# Altium PCB DieselHeaterV2.PcbDoc
Units mil, origin at the board's own origin, x right, y up, seen from the top; angles counter-clockwise.
Board outline 2940 x 1920 mil, 2 copper layers (Top Layer, Bottom Layer), stack 61.855 mil thick; 49 components, 40 nets, 228 pads, 26 vias.
Unrouted connection lines stored in the file: 54.
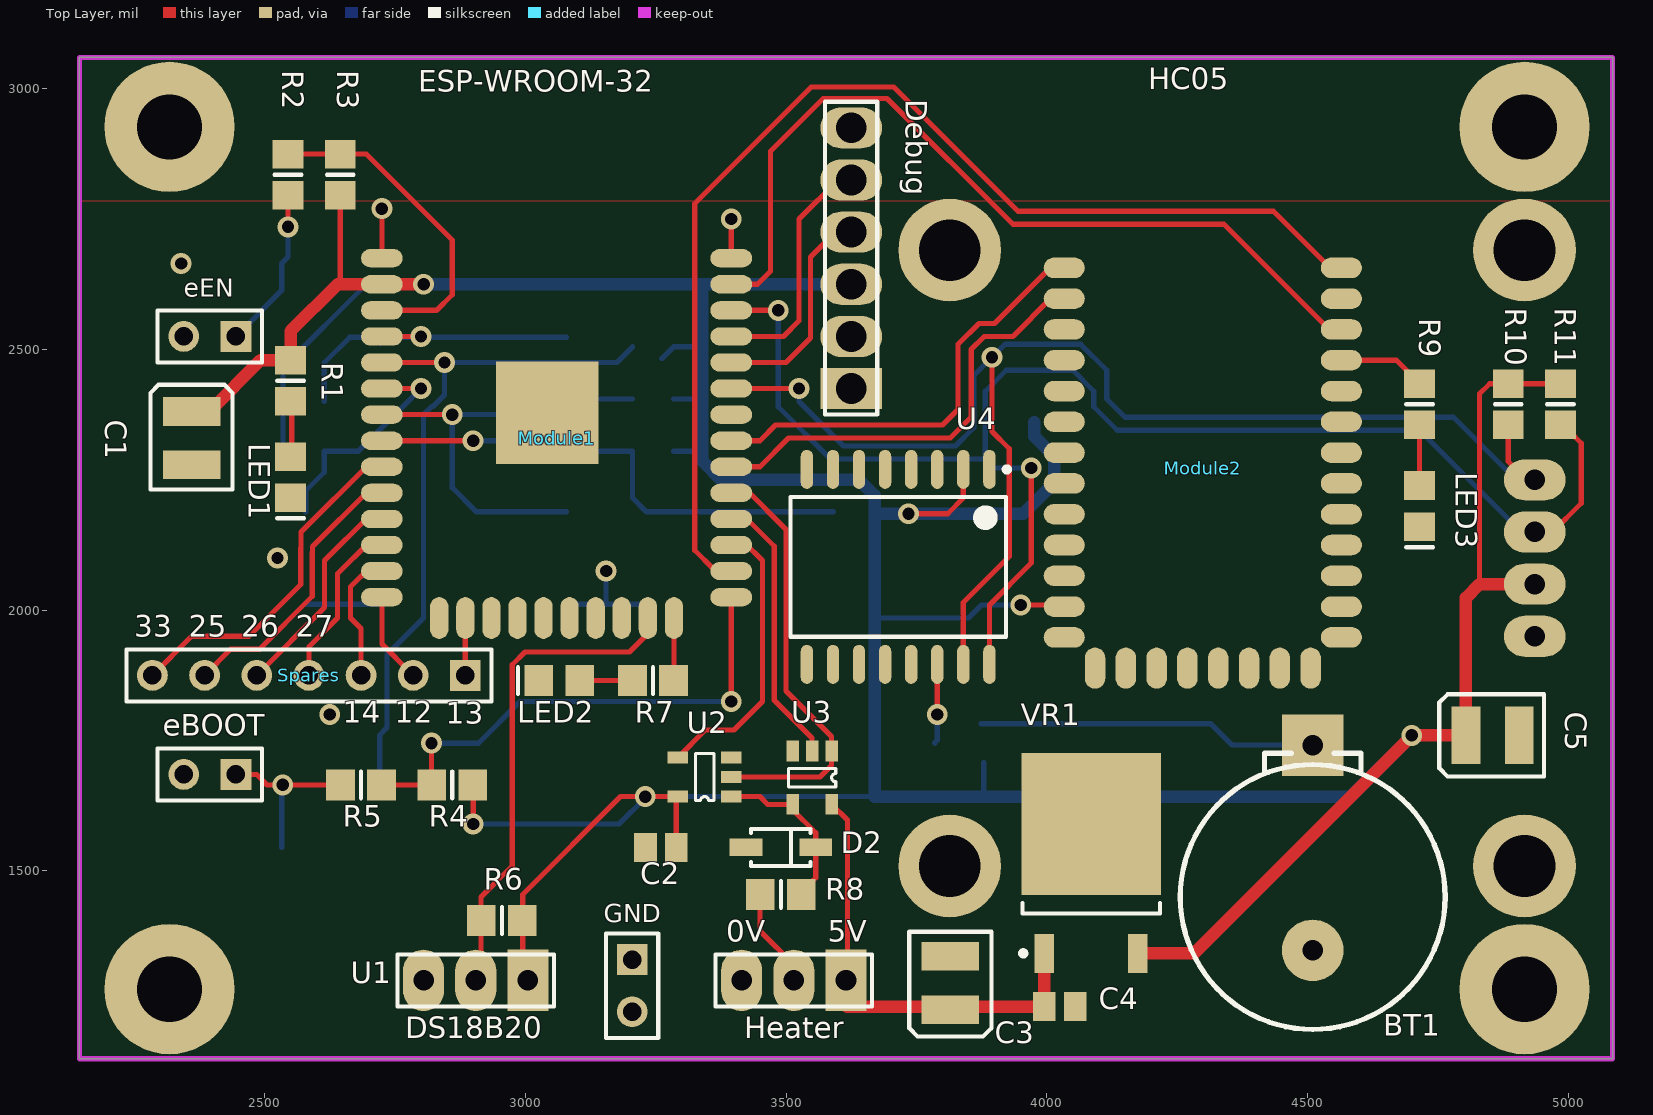
[diagram p0: Top Layer view]
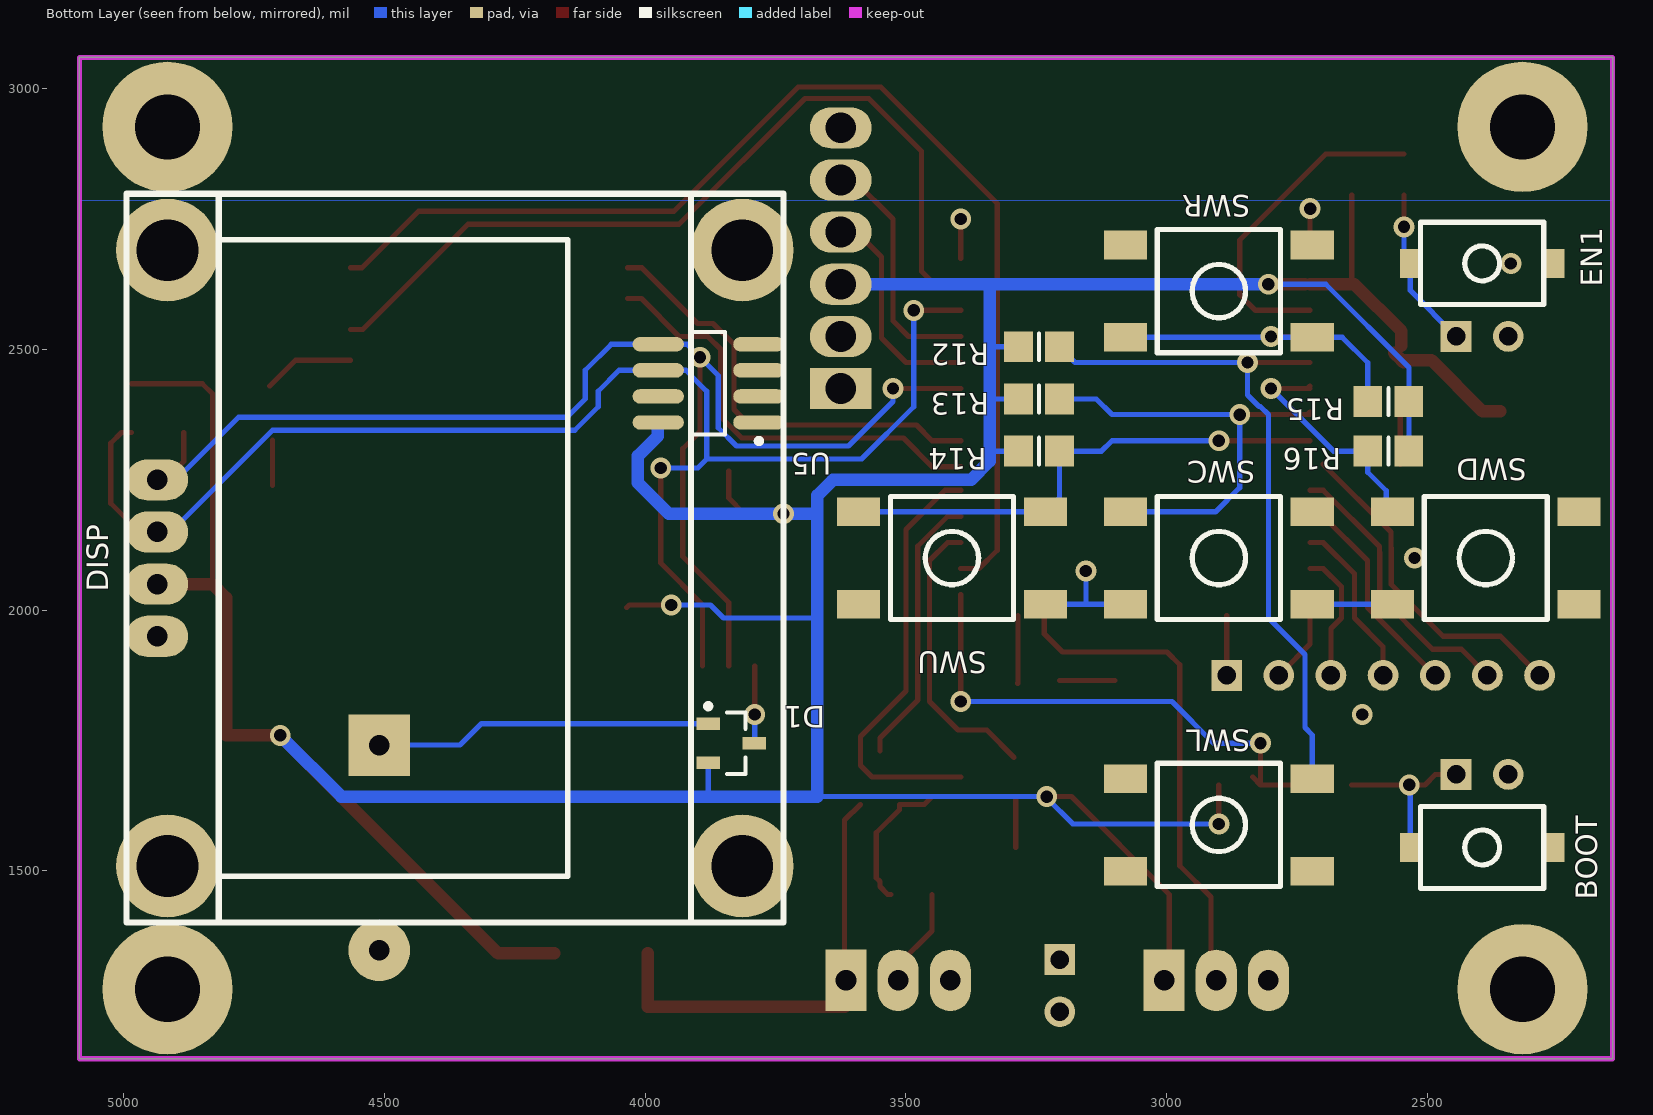
[diagram p1: Bottom Layer view, seen from below]
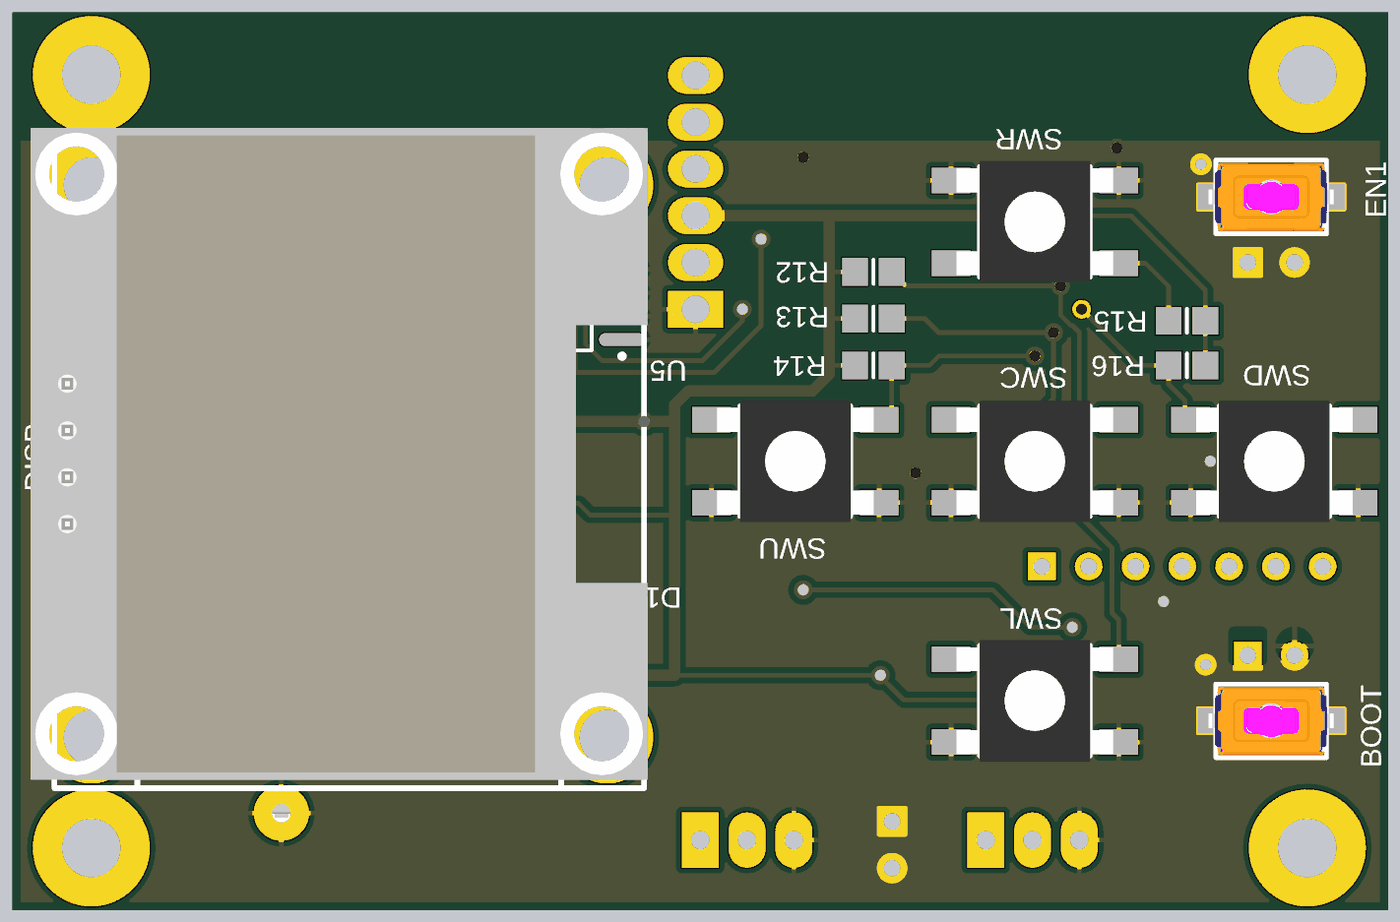
[diagram p2: 3D render of the assembled board from below, using the file's embedded part models]

## Layer stack, top to bottom
Top Solder: solder mask 0.4, Solder Resist, Dk 3.5
Top Layer: signal copper 1.4
Dielectric 1: dielectric 59.0551, FR-4, Dk 4.8
Bottom Layer: signal copper 1.4
Bottom Solder: solder mask 0.4, Solder Resist, Dk 3.5

## Board outline
2145,1140 2145,3060 5085,3060 5085,1140

## Design rules (kind name [scope] priority, off if disabled: settings)
Clearance [All] p1: gap=12 ignorepadtopadclearanceinfootprint=FALSE
HoleSize [All] p1: absolutevalues=TRUE maxlimit=125 minlimit=0.98 maxpercent=80.000 minpercent=20.000
MinimumSolderMaskSliver [All] p1: minsoldermaskwidth=8
PolygonConnect PolygonConnect_1 [isVia] p1: connectstyle=Direct reliefconductorwidth=10 reliefentries=4 polygonreliefangle="90 Angle" airgapwidth=10
PolygonConnect [All] p2: connectstyle=Relief reliefconductorwidth=10 reliefentries=4 polygonreliefangle="90 Angle" airgapwidth=12
RoutingVias [All] p1: holewidth=28 width=50 viastyle="Through Hole" minholewidth=28 minwidth=50 maxholewidth=28 maxwidth=50
SolderMaskExpansion [All] p1: expansion=3.15
Width [All] p1: maxlimit=50 minlimit=10 preferedwidth=10
28 further rules are at their usual default settings.

## Classes and differential pairs
component class U_UserInterface: BT1 D1 DISP R10 R11 SWC SWD SWL SWR SWU U4 U5
component class DieselHeater: BOOT C1 C2 C3 C4 C5 D2 Debug eBOOT eEN EN1 GND Heater LED1 LED2 LED3 Module1 Module2 R1 R2 R3 R4 R5 R6 R7 R8 R9 R12 R13 R14 R15 R16 Spares U1 U2 U3 VR1

## Components (designator, comment, footprint, x,y, rotation, side; value= is the part's Value field where it differs from the comment)
BOOT "SW-PB" TACTILE_SW_SIL 2395,1545 r0 bottom
BT1 "CR1220" C1220-1HF 4510,1450 r90 top
C1 "470uF" CASEB 2360,2330 r90 top
C2 "100n" C0805 3260,1545 r180 top value=100pF
C3 "470uF" CASEB 3815,1285 r270 top
C4 "100n" C0805 4025,1240 r0 top value=100nF
C5 "470uF" CASEB 4855,1760 r180 top
D1 "BAT54C" SOT-23_N 3835,1745 r180 bottom
D2 "5V6" SOD-123 3490,1545 r0 top
Debug "Header 6" HDR1X6 3625,2425 r90 top
DISP "OLED_128x64" "OLED 1.3" 4365,2100 r90 bottom locked
eBOOT "Header 2" HDR1X2 2445,1685 r180 top
eEN "Header 2" HDR1X2 2445,2525 r180 top
EN1 "SW-PB" TACTILE_SW_SIL 2395,2665 r0 bottom
GND "Header 2" HDR1X2 3205,1330 r270 top
Heater "Header 3" HDR1X3 3615,1290 r180 top
LED1 "GRN" 0805_LED 2550,2255 r270 top
LED2 "BLUE" 0805_LED 3065,1865 r180 top
LED3 "RED" 0805_LED 4715,2199.53 r270 top
Module1 "ESP-WROOM-32" ESP-WROOM-32 3060,1985 r0 top
Module2 "HC05" HC05 4033.5,2656.5 r0 top locked
R1 "470" 6-0805_M 2550,2440 r90 top
R2 "470" 6-0805_M 2545,2835 r90 top
R3 "12k" 6-0805_M 2645,2835 r270 top
R4 "470" 6-0805_M 2685,1665 r0 top
R5 "12k" 6-0805_M 2860,1665 r0 top
R6 "4k7" 6-0805_M 2955,1405 r0 top
R7 "470" 6-0805_M 3245,1865 r0 top
R8 "680" 6-0805_M 3490,1455 r180 top
R9 "470" 6-0805_M 4715,2395 r90 top
R10 "4k7" 6-0805_M 4885,2395 r90 top
R11 "4k7" 6-0805_M 4985,2395 r90 top
R12 "4k7" 6-0805_M 3245,2505 r0 bottom
R13 "4k7" 6-0805_M 3245,2405 r0 bottom
R14 "4k7" 6-0805_M 3245,2305 r0 bottom
R15 "4k7" 6-0805_M 2575,2400 r180 bottom
R16 "4k7" 6-0805_M 2575,2305 r180 bottom
Spares "" HDR1X7 2885,1875 r180 top
SWC "SMD_TACTILE_SW" SMD_TACTILE_SW 2900,2100 r90 bottom locked
SWD "SMD_TACTILE_SW" SMD_TACTILE_SW 2388.19,2100 r90 bottom locked
SWL "SMD_TACTILE_SW" SMD_TACTILE_SW 2900,1588.19 r90 bottom locked
SWR "SMD_TACTILE_SW" SMD_TACTILE_SW 2900,2611.81 r270 bottom locked
SWU "SMD_TACTILE_SW" SMD_TACTILE_SW 3411.81,2100 r90 bottom locked
U1 "DS18B20" HDR1X3 3005,1290 r180 top
U2 "74LVC1G32DBV" SOT23-5 3395,1680 r90 top
U3 "74LVC1G126DBV" SOT23-5 3550,1730 r180 top
U4 "DS3231" SOIC127P1030X265-16N 3715,2082.99 r270 top
U5 "I2CEEPROM" SO8_M 3878.54,2435 r0 bottom
VR1 "LM1117-3.3" SOT-252-3 4085,1515.2 r90 top

## Footprints (in the part's own frame and the unit in brackets; to place one, negate y for a bottom-side part, rotate by r counter-clockwise, add the part's x,y. Pads: shape width x height; smd on the part's side, far side on the other; paste and mask are expansions set on the pad)
6-0805_M [mm] "Chip Resistor, Body 2.0x1.2mm, IPC Low Density"
  rect 1.4x1.5 smd: 1(-1,0) 2(1,0)
  silkscreen extent 0,-0.65 0,0.65, body extent -1.07,-0.7 1.07,0.7, height 0.7
0805_LED [mm]
  rect 1.4x1.5 smd: 1(-1,0) 2(1,0)
  silkscreen extent 2,-0.65 2,0.65, body extent -1.03,-0.46 1.03,0.45, height 0.85
C0805 [mm] "Chip Capacitor, Body 2.0x1.3mm, IPC High Density"
  rect 1.1x1.4 smd: 1(-0.75,0) 2(0.75,0)
  body extent -1.1,-0.72 1.1,0.72, height 1.4
C1220-1HF [mm]
  rect 3x3 hole 1: 1(7.4,0)
  round 3 hole 1: 2(-2.6,0)
  silkscreen extent -6.45,-6.45 7,6.45, body extent -6.25,-6.25 7.45,6.25, height 4.2
CASEB [mm]
  rect 1.4x2.8 smd: 1(1.3,0) 2(-1.3,0)
  silkscreen extent -2.5,-2 2.6,2, body extent -1.75,-1.4 1.75,1.4, height 1.91
ESP-WROOM-32 [mil]
  oval 80x35 smd: 1(-335,690) 2(-335,640) 3(-335,590) 4(-335,540) 5(-335,490) 6(-335,440) 7(-335,390) 8(-335,340) 9(-335,290) 10(-335,240) 11(-335,190) 12(-335,140) 13(-335,90) 14(-335,40) 25(335,40) 26(335,90) 27(335,140) 28(335,190) 29(335,240) 30(335,290) 31(335,340) 32(335,390) 33(335,440) 34(335,490) 35(335,540) 36(335,590) 37(335,640) 38(335,690)
  oval 35x80 smd: 15(-225,0) 16(-175,0) 17(-125,0) 18(-75,0) 19(-25,0) 20(25,0) 21(75,0) 22(125,0) 23(175,0) 24(225,0)
  rect 196.85x196.85 smd: 39(-17.72,393.7)
  body extent -356,-20 356,986, height 118
HC05 [mm]
  oval 2x1 smd: 1(0,0) 2(0,-1.5) 3(0,-3) 4(0,-4.5) 5(0,-6) 6(0,-7.5) 7(0,-9) 8(0,-10.5) 9(0,-12) 10(0,-13.5) 11(0,-15) 12(0,-16.5) 13(0,-18) 22(13.5,-18) 23(13.5,-16.5) 24(13.5,-15) 25(13.5,-13.5) 26(13.5,-12) 27(13.5,-10.5) 28(13.5,-9) 29(13.5,-7.5) 30(13.5,-6) 31(13.5,-4.5) 32(13.5,-3) 33(13.5,-1.5) 34(13.5,0)
  oval 1x2 smd: 14(1.5,-19.5) 15(3,-19.5) 16(4.5,-19.5) 17(6,-19.5) 18(7.5,-19.5) 19(9,-19.5) 20(10.5,-19.5) 21(12,-19.5)
  body extent -0.26,-19.76 13.76,8.25, height 2.35
HDR1X2 [mm] "Connector; Header; 2 Position"
  rect 1.5x1.5 hole 0.9: 1(0,0)
  round 1.5 hole 0.9: 2(2.54,0)
  silkscreen extent -1.27,-1.27 3.81,1.27
HDR1X3 [mm] "Connector; Header; 3 Position"
  rect 2x3 hole 1: 1(0,0)
  oval 2x3 hole 1: 2(2.54,0) 3(5.08,0)
  silkscreen extent -1.27,-1.27 6.35,1.27
HDR1X6 [mm] "Connector; Header; 6 Position"
  rect 2x3 hole 1.5: 1(0,0)
  oval 2x3 hole 1.5: 2(2.54,0) 3(5.08,0) 4(7.62,0) 5(10.16,0) 6(12.7,0)
  silkscreen extent -1.27,-1.27 13.97,1.27
HDR1X7 [mm] "Connector; Header; 7 Position"
  rect 1.5x1.5 hole 0.9: 1(0,0)
  round 1.5 hole 0.9: 2(2.54,0) 3(5.08,0) 4(7.62,0) 5(10.16,0) 6(12.7,0) 7(15.24,0)
  silkscreen extent -1.27,-1.27 16.51,1.27
"OLED 1.3" [mm] "1.3\" OLED 128x64"
  oval 2x3 hole 1: 1(-3.81,14.5) 2(-1.27,14.5) 3(1.27,14.5) 4(3.81,14.5)
  round 5 hole 3: ""(-15,-14) ""(-15,14) ""(15,-14) ""(15,14)
  silkscreen extent -17.75,-16 17.75,16, body extent -17.3,-16.2 18.1,17.3, height 4.46
SMD_TACTILE_SW [mm]
  rect 1.4x2.1 smd: 1A(-2.25,-4.55) 1B(-2.25,4.55) 2A(2.25,-4.55) 2B(2.25,4.55)
  silkscreen extent -3,-3 3,3, body extent -3.3,-4.25 3.3,4.25, height 4.3
SO8_M [mm] "SOIC, 8-Leads, Body 4.9x3.9mm, Pitch 1.27mm, IPC Low Density"
  oval 2.5x0.7 smd: 1(-2.45,1.905) 2(-2.45,0.635) 3(-2.45,-0.635) 4(-2.45,-1.905) 5(2.45,-1.905) 6(2.45,-0.635) 7(2.45,0.635) 8(2.45,1.905)
  silkscreen extent -2.57,-2.5 0.8,2.93, body extent -2,-2.5 2,2.5, height 1.75
SOD-123 [mm]
  rect 1.6x0.85 smd: 1(-1.7,0) 2(1.7,0)
  silkscreen extent -1.45,-0.9 1.45,0.9, body extent -1.95,-0.9 1.95,0.9, height 1.18
SOIC127P1030X265-16N [mm] "SOIC, 16-Leads, Body 10.30x7.50mm, Pitch 1.27mm, IPC Medium Density"
  oval 1.9x0.6 smd: 1(-4.75,4.445) 2(-4.75,3.175) 3(-4.75,1.905) 4(-4.75,0.635) 5(-4.75,-0.635) 6(-4.75,-1.905) 7(-4.75,-3.175) 8(-4.75,-4.445) 9(4.75,-4.445) 10(4.75,-3.175) 11(4.75,-1.905) 12(4.75,-0.635) 13(4.75,0.635) 14(4.75,1.905) 15(4.75,3.175) 16(4.75,4.445)
  silkscreen extent -4.87,-5.25 3.4,5.42, body extent -5.31,-5.25 5.32,5.25, height 2.62
SOT23-5 [mm] "SOT143-4 as used in SP0503BAHTG"
  round 0.3 on Top Overlay: 1(-1.8,0)
  rect 0.6x1 smd: 1(-0.95,0) 2(0,0) 3(0.95,0) 4(0.95,2.6) 5(-0.95,2.6)
  silkscreen extent -1.15,0.85 1.15,1.75, body extent -1.46,0.13 1.46,2.47, height 1
SOT-23_N [mm] "SOT23, 3-Leads, Body 2.9x1.3mm, Pitch 0.95mm, Lead Span 2.5mm, IPC Medium Density"
  rect 1.15x0.6 smd: 1(-1.125,0.95) 2(-1.125,-0.95) 3(1.125,0)
  silkscreen extent -1.25,-1.5 0.7,1.92, body extent -0.7,-1.5 0.7,1.5, height 1.1
SOT-252-3 [mm] "D-PAK, 3-Pads, Body 6.20x6.72mm (max), IPC Medium Density"
  rect 1.9x0.95 smd: 1(-4.4,2.28) 3(-4.4,-2.28)
  rect 6.9x6.8 smd: 2(1.9,0)
  silkscreen extent -4.52,-3.35 -1.95,3.43, body extent -4.87,-3.29 4.83,3.29, height 2.3
TACTILE_SW_SIL [mm]
  rect 1x1.4 smd: 1(3.5,0) 2(-3.5,0)
  silkscreen extent -3,-2 3,2, body extent -3.4,-1.85 3.4,1.85, height 2.5

## Part data
BOOT EN1: "Switch", LatestRevisionDate=17-Jul-2002, LatestRevisionNote="Re-released for DXP Platform.", PackageDescription="Switch; 2 Leads", PackageReference=SPST-2, Published=24-Mar-1999, Publisher="Altium Limited"
BT1: library part Battery, "Multicell Battery", LatestRevisionDate=17-Jul-2002, LatestRevisionNote="Re-released for DXP Platform.", PackageDescription="Battery; 2 Leads", PackageReference=BAT-2, Published=24-Mar-1999, Publisher="Altium Limited"
C1 C3 C5: library part "Cap Pol1", "Polarized Capacitor (Radial)", LatestRevisionDate=17-Jul-2002, LatestRevisionNote="Re-released for DXP Platform.", PackageDescription="Polarized Capacitor (Radial); 2 Leads", PackageReference=RB7.6-15, Published=8-Jun-2000, Publisher="Altium Limited"
C2 C4: library part Cap, "Capacitor", LatestRevisionDate=17-Jul-2002, LatestRevisionNote="Re-released for DXP Platform.", PackageDescription="Radial Cap, Thru-Hole; 2 Leads; 0.3 in Pin Spacing", PackageReference=RAD-0.3, Published=8-Jun-2000, Publisher="Altium Limited"
D2: library part "D Zener", "Zener Diode", LatestRevisionDate=17-Jul-2002, LatestRevisionNote="Re-released for DXP Platform.", PackageDescription="Diode, Thru-Hole; 2 Leads; 0.7 in Pin Spacing", PackageReference=DIODE-0.7, Published=8-Jun-2000, Publisher="Altium Limited"
Debug: "Header, 6-Pin", LatestRevisionDate=17-Jul-2002, LatestRevisionNote="Re-released for DXP Platform.", Publisher="Altium Limited"
eBOOT eEN GND: "Header, 2-Pin", LatestRevisionDate=17-Jul-2002, LatestRevisionNote="Re-released for DXP Platform.", Publisher="Altium Limited"
Heater: "Header, 3-Pin", LatestRevisionDate=17-Jul-2002, LatestRevisionNote="Re-released for DXP Platform.", Publisher="Altium Limited"
LED1 LED2 LED3: library part LED0, "Typical INFRARED GaAs LED", LatestRevisionDate=08-Jul-2005, LatestRevisionNote="Mech Layer 1 removed.", PackageDescription="LED; 2 Leads", PackageReference=LED-0, Published=8-Jun-2000, Publisher="Altium Limited"
R1 R2 R3 R4 R5 R6 R7 R8 R9 R10 R11 R12 R13 R14 R15 R16: library part Res2, "Resistor", LatestRevisionDate=17-Jul-2002, LatestRevisionNote="Re-released for DXP Platform.", PackageDescription="Axial Device, Thru-Hole; 2 Leads; 0.4 in Pin Spacing", PackageReference=AXIAL-0.4, Published=8-Jun-2000, Publisher="Altium Limited"
Spares: library part "Header 7", "Header, 7-Pin", LatestRevisionDate=17-Jul-2002, LatestRevisionNote="Re-released for DXP Platform.", Publisher="Altium Limited"
U2: library part SN74LVC1G32DRY2
U3: library part SN74LVC1G126-EP, "Enhanced Product Single Bus Buffer Gate With 3-State Outputs, DCK0005A, LARGE T&R", F @ Nom Voltage(Max)(Mhz)=150, ICC @ Nom Voltage(Max)(mA)=0.01, Manufacturer="Texas Instruments", Operating Temperature Range(C)="-40 to 85", Rating="HiRel Enhanced Product", tpd @ Nom Voltage(Max)(ns)=8,5.5,4.5,4, Voltage(Nom)(V)=1.8,2.5,3.3,5, 3-State Output=Yes, Bits(#)=1, DatasheetVersion=SCES527A, Generic Part Number=SN74LVC1G126-EP, Input Type=CMOS/TTL, Logic=True, Output Drive (IOL/IOH)(Max)(mA)=32/-32, Output Type=CMOS, PackageReference=DCK0005A, PartNumber=SN74LVC1G126-EP, Schmitt Trigger=No, Sub-Family="Non-Inverting Buffer/Driver", Technology Family=LVC, VCC(Max)(V)=5.5, VCC(Min)(V)=1.65
U4: "Real Time Clock"
VR1: library part "Volt Reg", "Voltage Regulator", LatestRevisionDate=29-May-2009, LatestRevisionNote="IPC-7351 Footprint Added.", PackageDescription="3-Pin Transistor Outline Package 2.54 mm Pitch, 15.1 mm Lead Span", PackageReference=D2PAK, Published=24-Mar-1999, Publisher="Altium Limited"

## Free pads (board coordinates)
  round 250 hole 125: 2(4916.18,1273.23) 3(4916.18,2926.77) 4(2317.76,2926.77) 5(2317.76,1273.23)

## Via types
v1: diameter 40, hole 23.62, Top Layer to Bottom Layer, tented both sides, 22 vias
v2: diameter 40, hole 23.62, Top Layer to Bottom Layer, 4 vias

## Nets (pads, with @x,y where several pads share a name; then routed paths per layer and width w, separated by ;. In a path a pad name is that pad's centre, name@x,y a point inside that pad or via, vN(x,y) a via of type N, cw(c..) or ccw(c..) an arc to the next point about the centre after c; other vN are vias at no path point)
3V3: C1.1 C2.1 C5.1 D1.2 Debug.3 DISP.2 Module1.2 Module2.12 R1.2 R3.2 R5.2 R6.2 R10.2 R11.2 R12.2 R13.2 R14.2 R15.2 R16.2 U1.1 U2.5 U4.2 U5.8 VR1.3 | length 9036.5
  Top Layer w10: 2550,2507.36 R1.2@2564,2493.37 ; 2645,2630 R3.2 ; v1(2900,1590) R5.2@2900,1665 ; U1.1@3005,1240 3005,1285 2995,1295 2995,1455 3182.5,1642.5 v1(3230,1642.5) 3286.52,1642.5 3289.53,1639.49 C2.1 ; v1(3735,2185) 3810,2185 3840,2215 U4.2@3840,2267.01 ; v1(3950,2010) 4030.39,2010 Module2.12 Module2.12@4035.39,2005 ; 4830,2050 4830,2415 4849.37,2434.37 R10.2 R11.2
  Top Layer w24: C1.1 2394.18,2381.18 2492.37,2479.37 R1.2 ; R1.2@2545.63,2475 R1.2 ; 2550,2507.36 2550,2535 2640,2625 Module1.2 ; R1.2@2564,2493.37 R1.2 ; Module1.2@2735,2625 v1(2805,2625) ; VR1.3 4281.97,1341.97 v1(4700,1760) C5.1 4803.82,2023.82 4830,2050 DISP.2
  Bottom Layer w10: R16.2 R15.2 2535.63,2465.63 2695,2625 v1(2805,2625) ; v1(2900,1590) 3180,1590 3230,1640 v1(3230,1642.5) 3670,1642.5 ; R12.2@3261.87,2482.5 R12.2 3339.37,2505 ; R14.2 3339.37,2305 ; R13.2 3339.37,2405 ; 3670,1985 3850,1985 3875,2010 v1(3950,2010) ; 3875,1642.5 3879.29,1642.5 D1.2
  Bottom Layer w24: v1(2805,2625) 3339.37,2625 ; Debug.3@3640,2625 Debug.3 3339.37,2625 ; 3873.58,1642.5 3670,1642.5 3670,1985 3670,2185 ; 3879.29,1642.5 4582.5,1642.5 v1(4700,1760) ; U5.8@3976.46,2360 3976.46,2333.54 4014.25,2295.75 4014.25,2244.25 3955,2185 v1(3735,2185) 3670,2185 ; 3339.37,2625 3339.37,2505 3339.37,2405 3339.37,2305 3339.37,2285.63 3375,2250 3640,2250 3670,2220 3670,2185
5V: C3.1 C4.1 Heater.1 U3.5 VR1.1 | length 882.7
  Top Layer w10: U3.5 3617.64,1597.4 3617.64,1240 Heater.1@3615,1240 ; C4.1@3995.24,1240.24 C4.1
  Top Layer w24: Heater.1@3617.64,1240 C4.1 ; C4.1@3995.24,1240.24 VR1.1
CTR: Module1.7 R13.1 SWC.2B | length 878.5
  Top Layer w10: Module1.7 Module1.7@2730,2375 ; Module1.7@2725,2380 Module1.7@2730,2375 ; v1(2860,2375) Module1.7@2730,2375
  Bottom Layer w10: SWC.2B 2906.42,2188.58 2860,2235 v1(2860,2375) 3105,2375 3135,2405 R13.1
degC: Module1.23 R6.1 U1.2 | length 1004.1
  Top Layer w10: U1.2@2905,1240 2905,1285 2915,1295 2915,1450 2975,1510 2975,1895.5 2999.5,1920 3200,1920 3235,1955 Module1.23 Module1.23@3235,1990
DN: Module1.6 R16.1 SWD.2B | length 444.9
  Top Layer w10: Module1.6 v2(2800,2425) ; Module1.6@2725,2430 Module1.6@2727.5,2427.5
  Bottom Layer w10: SWD.2B@2579.13,2188.58 2579.13,2229.13 2614.37,2264.37 R16.1 2680,2305 v2(2800,2425)
EN: Module1.3 R2.2 R3.1 | length 635.8
  Top Layer w10: R2.2@2545,2875 2695,2875 2860,2710 2860,2605 2830,2575 Module1.3
GND: BOOT.2 BT1.2 C1.2 C2.2 C3.2 C4.2 C5.2 D2.1 Debug.1 DISP.1 eBOOT.2 eEN.2 EN1.2 GND.1 GND.2 Heater.3 LED1.2 LED2.2 LED3.2 Module1.1 Module1.15 Module1.38 Module1.39 Module2.13 Module2.21 Module2.22 SWC.1A SWC.1B SWD.1A SWD.1B SWL.1A SWL.1B SWR.1A SWR.1B SWU.1A SWU.1B U1.3 U2.3 U3.3 U4.5 U4.6 U4.7 U4.8 U4.9 U4.10 U4.11 U4.12 U4.13 U5.1 U5.2 U5.3 U5.4 U5.7 VR1.2 | length 512
  Top Layer w10: Module1.1@2725,2680 v1(2725,2770) ; Module1.38 v1(3395,2750)
  Bottom Layer w10: SWD.1B@2579.13,2011.42 SWC.1A ; SWC.1B 3155,2011.42 ; v1(3155,2075) 3155,2011.42 ; SWU.1A@3220.87,2011.42 3155,2011.42
  other v1: 2625,1800 2525,2100 2340,2665
GPIO0: Module1.25 R4.2 R5.1 | length 1010
  Top Layer w10: R4.2 R5.1@2820,1665 ; v1(2820,1745) R5.1@2820,1665 ; R5.1@2835,1680 R5.1@2820,1665 ; v1(3395,1825) Module1.25 Module1.25@3395,2030
  Bottom Layer w10: v1(2820,1745) 2910,1745 2990,1825 v1(3395,1825)
GPIO2: Module1.24 R7.2 | length 130.3
  Top Layer w10: Module1.24@3285,1990 Module1.24 3285,1860.63 R7.2@3285.63,1860
GPIO4: Module1.26 Module2.34 | length 2225.7
  Top Layer w10: Module1.26@3395,2080 3360,2080 3325,2115 3325,2780 3548.37,3003.37 3706.63,3003.37 3945,2765 4435,2765 4543.5,2656.5 Module2.34
GPIO5: Module1.29 U2.2 U3.1@3587.4,1730 | length 826.5
  Top Layer w10: U2.2 3565,1680 3587.4,1702.4 3587.4,1730 3587.4,1757.6 3500,1845 3500,2155 3425,2230 Module1.29@3395,2230
GPIO16: Module1.27 U2.4 | length 551.4
  Top Layer w10: U2.4 3345.24,1770 3400,1770 3455,1825 3455,2095 3420,2130 Module1.27@3395,2130
GPIO17: Module1.28 U3.2 | length 529.3
  Top Layer w10: Module1.28@3395,2180 3420,2180 3477.5,2122.5 3477.5,1830 3477,1829.5 3477,1828 3550,1755 U3.2
GPIO18: Module1.30 Module2.2 | length 848.2
  Top Layer w10: Module1.30 3450,2275 3505,2330 3815,2330 3855,2370 3855,2500 3880,2525 3935,2525 4007.44,2597.44 Module2.2
GPIO19: Module1.31 Module2.1 | length 849
  Top Layer w10: Module1.31 3450,2325 3480,2355 3800,2355 3830,2385 3830,2510 3870,2550 3900,2550 4006.5,2656.5 Module2.1
GPIO23: Module1.37 Module2.32 | length 1635.8
  Top Layer w10: Module1.37 3445,2625 3470,2650 3470,2880 3571.37,2981.37 3693.63,2981.37 3935,2740 4340,2740 4541.61,2538.39 Module2.32
IO12: Module1.14 Spares.2 | length 192.8
  Top Layer w10: Module1.14@2725,2030 Module1.14 2725,1935 2780,1880 Spares.2@2800,1880
IO13: Module1.16 Spares.1 | length 115
  Top Layer w10: Spares.1 Module1.16 Module1.16@2885,1990
IO14: Module1.13 Spares.3 | length 252.8
  Top Layer w10: Spares.3 2685,1965 2665,1985 2665,2045 2700,2080 Module1.13@2725,2080
IO25: Module1.10 Spares.6 | length 542.7
  Top Layer w10: Spares.6 2435,1925 2490,1925 2591.61,2026.61 2591.61,2110 2592,2110.39 2592,2122 2700,2230 Module1.10@2725,2230
IO26: Module1.11 Spares.5 | length 419.1
  Top Layer w10: Spares.5 2615,2005 2615,2095 2700,2180 Module1.11@2725,2180
IO27: Module1.12 Spares.4 | length 327.6
  Top Layer w10: Spares.4 2585,1930 2640,1985 2640,2070 2700,2130 Module1.12@2725,2130
IO33: Module1.9 Spares.7 | length 641.3
  Top Layer w10: Spares.7 2360,1950 2470,1950 2569.61,2049.61 2569.61,2119.11 2570,2119.5 2570,2150 Module1.9@2700,2280
LFT: Module1.5 R12.1 SWL.2A | length 1344.1
  Top Layer w10: Module1.5 v1(2845,2475)
  Bottom Layer w10: SWL.2A 2720.87,1760.87 2735,1775 2735,1915 2805,1985 2805,2375 2820.5,2390.5 2822.83,2390.5 2845,2412.67 v1(2845,2475) 3175.63,2475 R12.1
NetBOOT_1: BOOT.1 eBOOT.1 R4.1 | length 344.8
  Top Layer w10: eBOOT.1@2430,1685 eBOOT.1 2485,1685 2505,1665 v2(2535,1665) R4.1
  Bottom Layer w10: BOOT.1 2532.8,1662.8 v2(2535,1665)
NetBT1_1: BT1.1 D1.1 | length 652.7
  Bottom Layer w10: D1.1@3874.29,1782.4 D1.1 4313.94,1782.4 4355,1741.34 BT1.1
NetD1_3: D1.3 U4.14 | length 150.4
  Top Layer w10: v1(3790,1800) U4.14@3790,1892.99
  Bottom Layer w10: D1.3@3785.71,1745 3785,1745.71 3790,1750.71 v1(3790,1800)
NetD2_2: D2.2 R8.1 U2.1@3395,1642.6 U3.4 | length 329.5
  Top Layer w10: U2.1@3395,1642.6 3450.04,1642.6 3465,1627.64 U3.4 3512.6,1617.4 3556.93,1573.07 D2.2 3556.93,1486.93 3550,1480 3550,1470 3535,1455 R8.1
NeteEN_1: eEN.1 EN1.1 R2.1 | length 311.5
  Top Layer w10: v2@2545,2735.59 R2.1
  Bottom Layer w10: eEN.1 2532.8,2612.8 EN1.1 2545,2677.2 v2(2545,2735)
NetHeater_2: Heater.2 R8.2 | length 241.9
  Top Layer w10: R8.2@3450,1455 3450,1385 3515,1320 Heater.2 Heater.2@3515,1240
NetLED1_1: LED1.1 R1.1 | length 121.7
  Top Layer w10: LED1.1@2552.33,2279.73 R1.1@2552.33,2401.47
NetLED2_1: LED2.1 R7.1 | length 106.7
  Top Layer w10: LED2.1@3098.9,1865 LED2.1 R7.1
NetLED3_1: LED3.1 R9.1 | length 87.4
  Top Layer w10: LED3.1 4715,2326.26
NetModule2_31: Module2.31 R9.2 | length 175.4
  Top Layer w10: Module2.31 4670.67,2479.33 R9.2@4720,2430
RGT: Module1.4 R15.1 SWR.2A SWR.2B | length 621.8
  Top Layer w10: Module1.4@2747.5,2525 v2(2800,2525) v2@2805,2525
  Bottom Layer w10: R15.1 2614.37,2474.37 2663.23,2523.23 2709.06,2523.23 SWR.2B@2720.87,2511.42 ; SWR.2B SWR.2A
Rx0: Debug.4 Module1.34 | length 414.4
  Top Layer w10: Module1.34 3500,2475 3547,2522 3547,2677 3595,2725 Debug.4@3615,2725
SCL: DISP.3 Module1.36 R11.1 U4.16 U5.6 | length 2843.4
  Top Layer w10: Module1.36 v1(3485,2575) ; U4.16@3890,1892.99 U4.16 3890,2010 3970.25,2090.25 v1(3970.25,2272.64) ; DISP.3 4970,2150 5025,2205 5025,2320 5004.37,2340.63 R11.1@4985,2340.63
  Bottom Layer w10: v1(3485,2575) 3485,2390 3585,2290 3882,2290 ; v1(3970.25,2272.64) 3899.36,2272.64 3882,2290 ; DISP.3 4910,2150 4715,2345 4135,2345 4090,2390 4090,2420 4050,2460 U5.6 3922.33,2460 3882,2419.67 3882,2290
SDA: DISP.4 Module1.33 R10.1 U4.15 U5.5 | length 2643.5
  Top Layer w10: Module1.33 v1(3525,2425) ; U4.15@3840,1892.99 U4.15 3840,2015 3928,2103 3928,2309.67 3895,2342.67 v1(3895,2485) ; R10.1@4885,2340.63 4885,2285 4920,2250 DISP.4
  Bottom Layer w10: v1(3525,2425) 3525,2400 3610,2315 3825,2315 3860,2350 3860,2450 v1(3895,2485) 3920,2510 U5.5 4065,2510 4115,2460 4115,2405 4150,2370 4780,2370 4900,2250 DISP.4
Tx0: Debug.5 Module1.35 | length 483.5
  Top Layer w10: Module1.35 3495,2525 3525,2555 3525,2750 3600,2825 Debug.5 Debug.5@3640,2825
UP: Module1.8 R14.1 SWU.2A SWU.2B | length 974.8
  Top Layer w10: Module1.8 v1(2900,2325)
  Bottom Layer w10: v1(2900,2325) 3105,2325 3125,2305 R14.1 3205.63,2215.63 SWU.2A SWU.2B
pads on no net: Debug.2 Debug.6 DISP. Module1.17 Module1.18 Module1.19 Module1.20 Module1.21 Module1.22 Module1.32 Module2.3 Module2.4 Module2.5 Module2.6 Module2.7 Module2.8 Module2.9 Module2.10 Module2.11 Module2.14 Module2.15 Module2.16 Module2.17 Module2.18 Module2.19 Module2.20 Module2.23 Module2.24 Module2.25 Module2.26 Module2.27 Module2.28 Module2.29 Module2.30 Module2.33 SWC.2A SWD.2A SWL.2B U2.1@3395,1609.13 U3.1@3620.87,1730 U4.1 U4.3 U4.4

## Polygon pours and split planes (outlines as drawn)
GND on Bottom Layer "BottomPoly" (solid, remove dead copper, shelved, pour order 4): 2145,2785 5085,2785 5085,1140 2145,1140
GND on Top Layer "BottomPoly" (solid, remove dead copper, shelved, pour order 2): 2145,2785 5085,2785 5085,1140 2145,1140

## Keep-outs
Keep-Out Layer:
  the board outline again, w10

## Silkscreen, mask and mechanical layers (free items; w line width, h text height)
Top Overlay:
  text "33" at 2250,1935 h70.87
  text "25" at 2355,1935 h70.87
  text "26" at 2455,1935 h70.87
  text "27" at 2560,1935 h70.87
  text "14" at 2650,1770 h70.87
  text "12" at 2750,1770 h70.87
  text "13" at 2847.82,1767.82 h70.87
  text "0V" at 3385,1350 h70.87
  text "5V" at 3580,1350 h70.87